# Allegro board ISL95338EVAL1Z_REVB.BRD
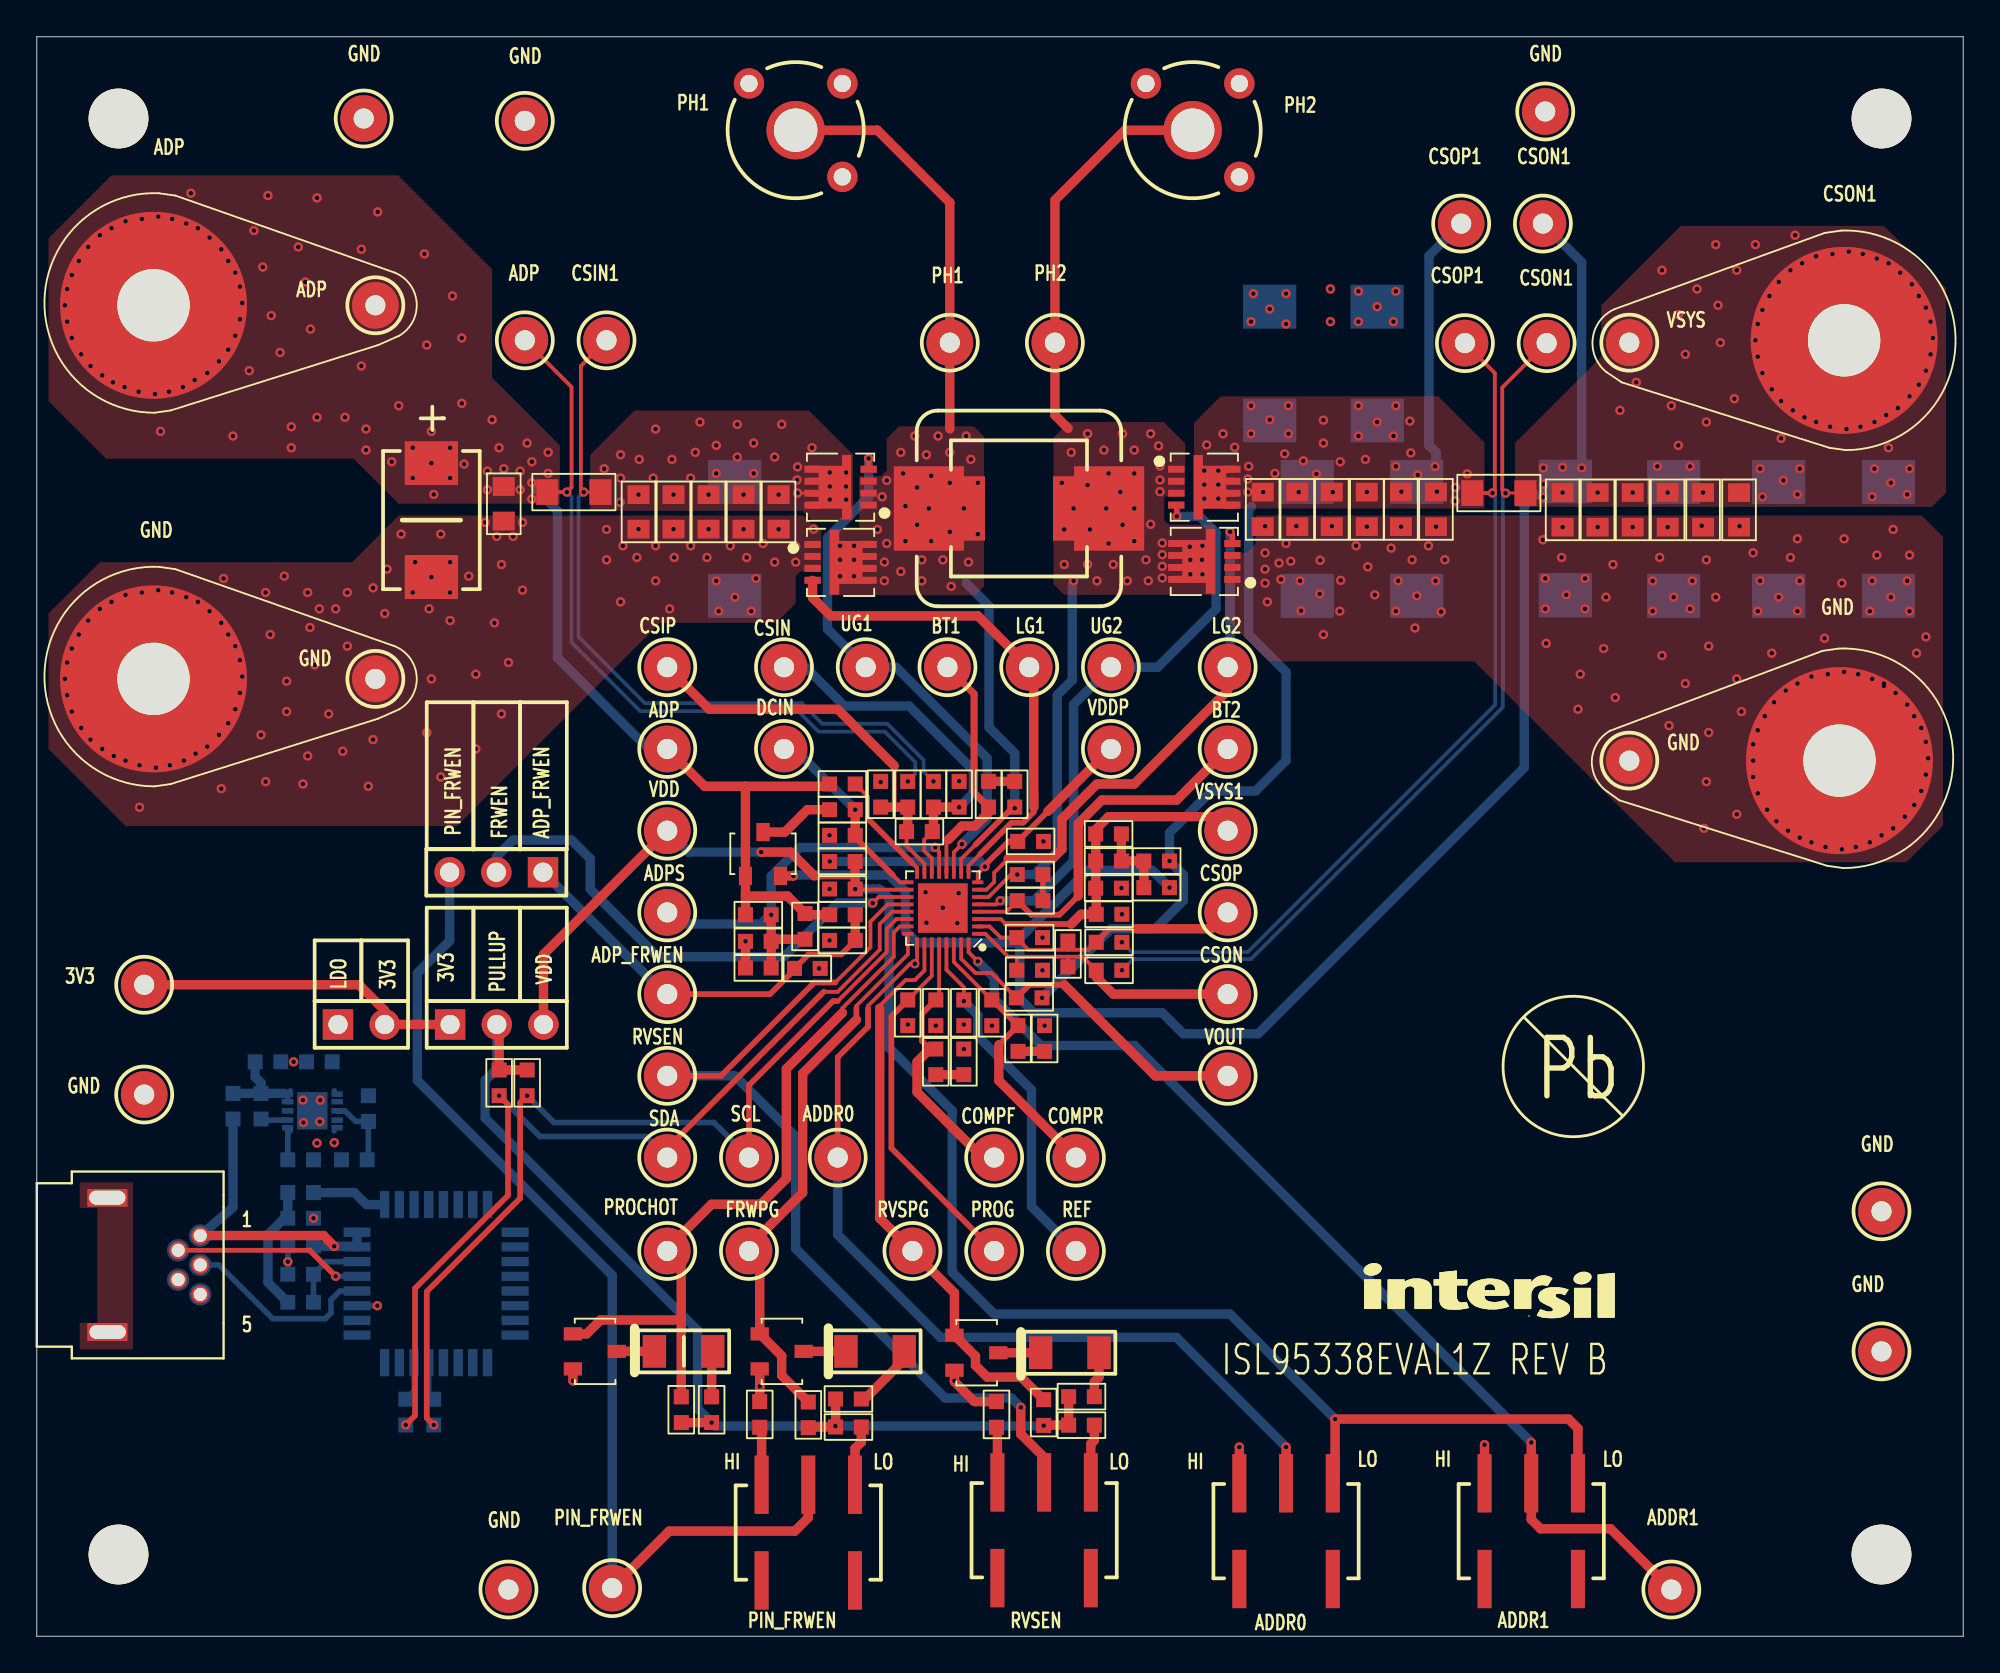
[diagram p0: board, top side]
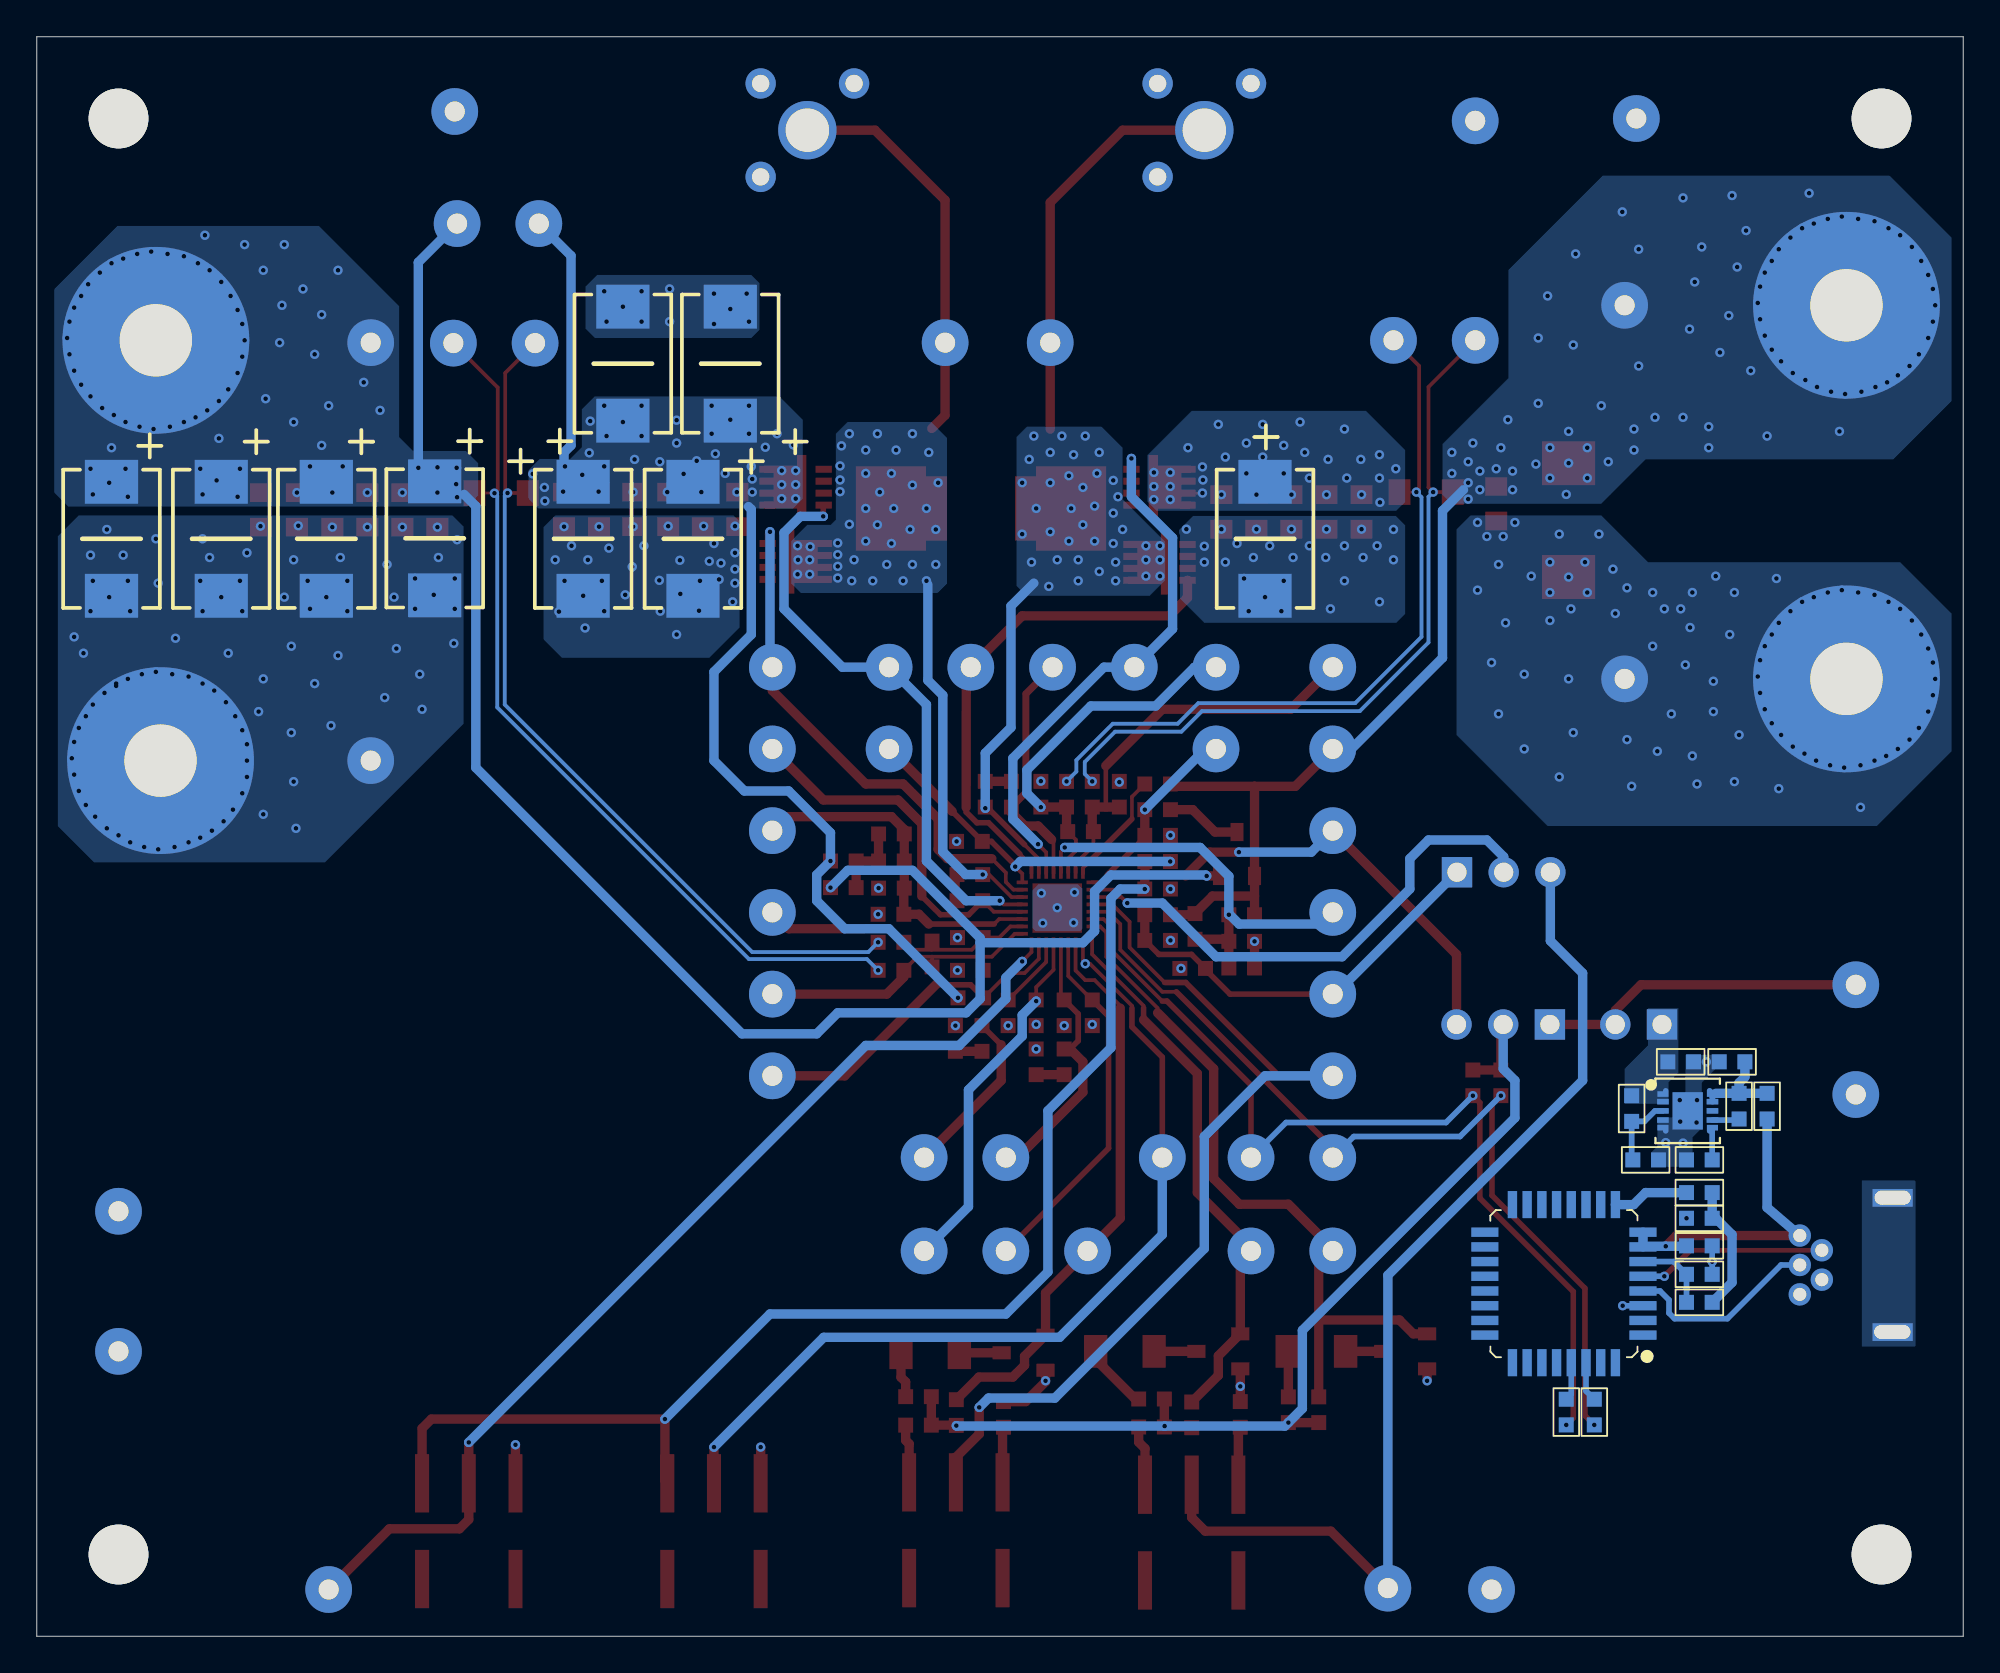
[diagram p1: board, bottom side, seen from below]

Outline 104.78 x 87 mm; copper layers: TOP, L2, L3, BOTTOM. Coordinates in mm from the lower left corner of the outline.
Outline path: 0,87 0,0 104.78,0 104.78,87 0,87 ; 3.18,23.5 arc(2.87,23.87) 3.21,24.21 4.47,24.21 arc(4.8,23.82) 4.39,23.5 3.18,23.5 ; 3.21,16.2 arc(2.9,16.56) 3.23,16.91 4.49,16.91 arc(4.82,16.51) 4.42,16.2 3.21,16.2

## Design rules (mm)
nets with their own width: min track width 0.152; nets CSON1 DCIN

## Placement (name value [footprint] x y rotation side)
C1  NC  [CAP_SANYO_D2]  100.71 59.69 270 bottom
C2  NC  [CAP_SANYO_D2]  94.74 59.69 270 bottom
C3  NC  [CAP_SANYO_D2]  89.03 59.69 270 bottom
C4  NC  [CAP_SANYO_D2]  83.13 59.72 270 bottom
C5  NC  [SM0805_DELTA]  90.63 61.26 90 top
C6  NC  [SM0805_DELTA]  92.58 61.26 90 top
C7  NC  [SM0805_DELTA]  82.99 61.26 90 top
C8  NC  [SM0805_DELTA]  84.89 61.26 90 top
C9  NC  [SM0805_DELTA]  86.8 61.26 90 top
C10  NC  [SM0805_DELTA]  88.7 61.26 90 top
C18  NC  [SM0805_DELTA]  25.4 61.59 90 top
C19  47u  [CAP_SANYO_D2]  37.97 59.69 270 bottom
C20  22u  [SM0805_DELTA]  40.35 61.15 90 top
C21  22u  [SM0805_DELTA]  38.44 61.15 90 top
C22  22u  [SM0805_DELTA]  36.54 61.15 90 top
C23  22u  [SM0805_DELTA]  34.63 61.15 90 top
C24  22u  [SM0805_DELTA]  32.73 61.15 90 top
C26  4.7uF  [SM0603_DELTA]  48.01 43.76 180 top
C28  1u  [SM0603_DELTA]  45.9 45.8 270 top
C29  1u  [SM0603_DELTA]  50.16 45.8 270 top
C30  0.22uF  [SM0603_DELTA]  51.77 45.8 90 top
C31  1uF  [SM0603_DELTA]  43.81 43.56 0 top
C32  1uF  [SM0603_DELTA]  54.05 43.23 180 top
C33  1uF  [SM0603_DELTA]  43.81 40.64 0 top
C34  1u  [SM0603_DELTA]  54 38 180 top
C35  1u  [SM0603_DELTA]  54 36.22 180 top
C36  0.22uF  [SM0603_DELTA]  54.03 40.01 180 top
C37  4.7u  [SM0603_DELTA]  56.08 37.11 90 top
C38  NC  [SM0603_DELTA]  39.24 36.35 0 top
C45  1000pF  [SM0603_DELTA]  50.42 33.91 90 top
C46  22n  [SM0603_DELTA]  50.42 31.24 270 top
C81  1uF  [SM0603_DELTA]  12.57 31.24 180 bottom
C82  1000pF  [SM0603_DELTA]  14.35 25.91 180 bottom
C83  1uF  [SM0603_DELTA]  15.37 31.24 0 bottom
C84  0.1uF  [SM0603_DELTA]  14.35 19.68 0 bottom
C85  0.1uF  [SM0603_DELTA]  14.35 22.73 180 bottom
C86  0.1uF  [SM0603_DELTA]  14.35 21.23 0 bottom
C87  NC  [SM0603_DELTA]  48.89 33.91 90 top
C98  NC  [SM0603_DELTA]  51.94 33.91 90 top
C99  22n  [SM0603_DELTA]  54.81 32.51 270 top
C100  0.1uF  [SM0603_DELTA]  41.91 36.32 180 top
C101  NC  [CAP_SANYO_D2]  21.46 60.71 270 top
C102  NC  [SM0603_DELTA]  41.78 38.61 90 top
C103  NC  [SM0603_DELTA]  58.29 40.69 180 top
C104  NC  [SM0603_DELTA]  58.29 43.64 180 top
C105  22u  [SM0805_DELTA]  70.43 61.29 90 top
C106  22u  [SM0805_DELTA]  72.34 61.29 90 top
C107  22u  [SM0805_DELTA]  74.19 61.29 90 top
C108  22u  [SM0805_DELTA]  76.1 61.29 90 top
C109  22u  [SM0805_DELTA]  68.55 61.29 90 top
C110  22u  [SM0805_DELTA]  66.67 61.29 90 top
C111  47u  [CAP_SANYO_D2]  69.09 59.69 270 bottom
C112  47u  [CAP_SANYO_D2]  75.06 59.69 270 bottom
C113  47u  [CAP_SANYO_D2]  67.06 69.22 90 bottom
C114  47u  [CAP_SANYO_D2]  72.9 69.22 90 bottom
D1  BAT54C  [SOT23]  39.5 42.55 0 top
J1  Banana_J  [111-07XX-001]  6.35 72.39 180 top
J2  Banana_J  [111-07XX-001]  6.35 52.07 180 top
J3  Banana_J  [111-07XX-001]  98.3 70.48 0 top
J4  Banana_J  [111-07XX-001]  98.04 47.62 0 top
J10  USB_MOL54819_0511  [MOL54819_0511]  8.89 20.19 0 top
JP4  conn_2p  [CONN2]  16.38 33.27 0 top
JP6  Jumper_3p  [CONN-1X3]  22.48 33.27 90 top
JP7  Jumper_3p  [CONN-1X3]  27.53 41.55 270 top
L1  10x10  [ETQP4LXXXWFC]  53.42 61.34 180 top
L2  2uH  [IND_PIMB061H]  53.42 61.34 0 top
LED1  597_3311_402  [SM1206]  35.18 15.49 0 top
LED2  597_3311_402  [SM1206]  45.59 15.49 0 top
LED3  597_3311_402  [SM1206]  56.18 15.42 0 top
NOREF  -  []  83.57 30.99 0 top
NOREF#2  -  [unnamed#2]  100.33 4.44 0 top
NOREF#3  -  []  0 87 0 top
NOREF#4  -  []  -88.27 -76.84 0 top
NOREF#5  -  []  70.52 16.32 0 top
NOREF#6  -  [unnamed#2]  100.33 82.55 270 top
NOREF#7  -  [unnamed#2]  4.44 4.44 0 top
NOREF#8  -  [unnamed#2]  4.44 82.55 0 top
NOREF#9  -  []  104.78 0 90 top
Q1  AON7410  [PWRPAK_SINGLE_1212_8]  43.72 62.5 180 top
Q2  AON7410  [PWRPAK_SINGLE_1212_8]  43.72 58.41 0 top
Q3  AON7410  [PWRPAK_SINGLE_1212_8]  63.5 58.46 180 top
Q4  AON7410  [PWRPAK_SINGLE_1212_8]  63.5 62.5 0 top
Q8  2N7002  [SOT23]  40.51 15.49 270 top
Q9  2N7002  [SOT23]  30.35 15.49 270 top
Q10  2N7002  [SOT23]  51.1 15.42 270 top
R1  1  [SM0603_DELTA]  47.37 45.8 270 top
R2  1  [SM0603_DELTA]  48.77 45.8 270 top
R4  0  [SM0603_DELTA]  43.81 46.35 0 top
R6  0  [SM0603_DELTA]  53.19 45.8 90 top
R7  1  [SM0603_DELTA]  43.81 44.96 180 top
R8  4.7  [SM0603_DELTA]  43.81 42.14 180 top
R9  0  [SM0603_DELTA]  39.24 39.24 180 top
R10  1  [SM0603_DELTA]  58.32 37.74 180 top
R11  0  [SM0603_DELTA]  54.03 41.43 0 top
R12  0  [SM0603_DELTA]  53.98 34.72 180 top
R13  NC  [SM0603_DELTA]  39.24 37.8 0 top
R14  1  [SM0603_DELTA]  58.32 36.22 180 top
R15  10K  [SM0603_DELTA]  25.15 30.1 90 top
R16  10K  [SM0603_DELTA]  26.67 30.1 90 top
R23  133K  [SM0603_DELTA]  47.37 33.91 270 top
R27  698  [SM0603_DELTA]  48.89 31.24 270 top
R28  100K  [SM0603_DELTA]  44.15 11.38 0 top
R31  100K  [SM0603_DELTA]  56.82 11.48 0 top
R32  220  [SM0603_DELTA]  36.7 12.32 270 top
R33  220  [SM0603_DELTA]  44.15 12.9 180 top
R34  220  [SM0603_DELTA]  56.82 13.03 180 top
R36  10K  [SM0603_DELTA]  41.96 12.04 90 top
R38  10K  [SM0603_DELTA]  35.05 12.32 90 top
R39  10K  [SM0603_DELTA]  54.76 12.17 90 top
R44  100K  [SM0603_DELTA]  39.32 12.06 90 top
R45  100K  [SM0603_DELTA]  52.2 12.06 90 top
R81  10k  [SM0603_DELTA]  12.19 28.83 270 bottom
R82  5.62K  [SM0603_DELTA]  18.03 28.7 90 bottom
R83  1K  [SM0603_DELTA]  17.27 25.91 0 bottom
R84  0  [SM0603_DELTA]  10.67 28.83 270 bottom
R85  0  [SM0603_DELTA]  20.07 12.19 90 bottom
R86  0  [SM0603_DELTA]  21.59 12.19 90 bottom
R87  1K  [SM0603_DELTA]  14.35 18.16 180 bottom
R88  1K  [SM0603_DELTA]  14.35 24.13 0 bottom
R93  0  [SM0603_DELTA]  58.29 42.16 180 top
R94  NC  [SM0603_DELTA]  58.32 39.27 0 top
R97  698  [SM0603_DELTA]  53.37 32.51 270 top
R98  402K  [SM0603_DELTA]  43.81 39.24 180 top
R99  135k  [SM0603_DELTA]  43.81 37.85 0 top
R102  NC  [SM0603_DELTA]  60.91 42.16 0 top
R103  0  [SM0603_DELTA]  60.91 40.72 180 top
RS1  0.02  [SM1206_DELTA]  29.21 62.23 180 top
RS2  0.01  [SM1206_DELTA]  79.52 62.18 180 top
SW1  GT11MSCKE  [GT11SC]  41.96 5.64 180 top
SW2  GT11MSCKE  [GT11SC]  54.79 5.77 180 top
SW3  GT11MSCKE  [GT11SC]  67.94 5.71 180 top
SW4  GT11MSCKE  [GT11SC]  81.28 5.71 180 top
TP1  KEYSTONE-PN-500X-100P40H  [MTP500X]  18.41 72.39 0 top
TP2  KEYSTONE-PN-500X-100P40H  [MTP500X]  18.41 52.07 0 top
TP3  KEYSTONE-PN-500X-100P40H  [MTP500X]  26.54 70.48 270 top
TP4  KEYSTONE-PN-500X-100P40H  [MTP500X]  86.61 70.36 0 top
TP5  KEYSTONE-PN-500X-100P40H  [MTP500X]  86.61 47.62 0 top
TP6  KEYSTONE-PN-500X-100P40H  [MTP500X]  30.99 70.48 270 top
TP7  KEYSTONE-PN-500X-100P40H  [MTP500X]  34.29 48.26 0 top
TP8  KEYSTONE-PN-500X-100P40H  [MTP500X]  81.91 76.83 0 top
TP9  KEYSTONE-PN-500X-100P40H  [MTP500X]  45.09 52.7 90 top
TP10  KEYSTONE-PN-500X-100P40H  [MTP500X]  58.42 52.7 0 top
TP11  KEYSTONE-PN-500X-100P40H  [MTP500X]  40.64 52.7 0 top
TP12  KEYSTONE-PN-500X-100P40H  [MTP500X]  34.29 52.7 90 top
TP13  Probe Socket  [TEK131-4353-00]  62.86 81.91 0 top
TP14  Probe Socket  [TEK131-4353-00]  41.27 81.91 0 top
TP15  KEYSTONE-PN-500X-100P40H  [MTP500X]  49.53 52.7 0 top
TP16  KEYSTONE-PN-500X-100P40H  [MTP500X]  53.98 52.7 0 top
TP17  KEYSTONE-PN-500X-100P40H  [MTP500X]  40.64 48.26 0 top
TP18  KEYSTONE-PN-500X-100P40H  [MTP500X]  64.77 52.7 0 top
TP19  KEYSTONE-PN-500X-100P40H  [MTP500X]  58.42 48.26 0 top
TP20  KEYSTONE-PN-500X-100P40H  [MTP500X]  34.29 43.81 0 top
TP21  KEYSTONE-PN-500X-100P40H  [MTP500X]  34.29 39.37 0 top
TP22  KEYSTONE-PN-500X-100P40H  [MTP500X]  64.77 48.26 0 top
TP23  KEYSTONE-PN-500X-100P40H  [MTP500X]  77.67 70.33 90 top
TP24  KEYSTONE-PN-500X-100P40H  [MTP500X]  34.29 26.04 0 top
TP25  KEYSTONE-PN-500X-100P40H  [MTP500X]  64.77 43.81 0 top
TP26  KEYSTONE-PN-500X-100P40H  [MTP500X]  38.73 26.04 0 top
TP27  KEYSTONE-PN-500X-100P40H  [MTP500X]  64.77 39.37 0 top
TP28  KEYSTONE-PN-500X-100P40H  [MTP500X]  34.29 34.92 0 top
TP29  KEYSTONE-PN-500X-100P40H  [MTP500X]  82.12 70.33 90 top
TP30  KEYSTONE-PN-500X-100P40H  [MTP500X]  64.77 34.92 0 top
TP31  KEYSTONE-PN-500X-100P40H  [MTP500X]  43.56 26.04 0 top
TP32  KEYSTONE-PN-500X-100P40H  [MTP500X]  88.9 2.54 0 top
TP33  KEYSTONE-PN-500X-100P40H  [MTP500X]  52.07 20.95 0 top
TP34  KEYSTONE-PN-500X-100P40H  [MTP500X]  56.52 26.04 0 top
TP35  KEYSTONE-PN-500X-100P40H  [MTP500X]  64.77 30.48 0 top
TP36  KEYSTONE-PN-500X-100P40H  [MTP500X]  56.52 20.95 0 top
TP37  KEYSTONE-PN-500X-100P40H  [MTP500X]  52.07 26.04 0 top
TP43  KEYSTONE-PN-500X-100P40H  [MTP500X]  31.29 2.62 0 top
TP44  KEYSTONE-PN-500X-100P40H  [MTP500X]  34.29 30.48 0 top
TP45  KEYSTONE-PN-500X-100P40H  [MTP500X]  38.73 20.95 0 top
TP46  KEYSTONE-PN-500X-100P40H  [MTP500X]  34.29 20.95 0 top
TP47  KEYSTONE-PN-500X-100P40H  [MTP500X]  47.62 20.95 0 top
TP48  KEYSTONE-PN-500X-100P40H  [MTP500X]  26.54 82.42 0 top
TP49  KEYSTONE-PN-500X-100P40H  [MTP500X]  17.78 82.55 0 top
TP50  KEYSTONE-PN-500X-100P40H  [MTP500X]  5.84 29.46 0 top
TP51  KEYSTONE-PN-500X-100P40H  [MTP500X]  100.33 15.49 0 top
TP52  KEYSTONE-PN-500X-100P40H  [MTP500X]  100.33 23.11 0 top
TP53  KEYSTONE-PN-500X-100P40H  [MTP500X]  5.84 35.43 0 top
TP54  KEYSTONE-PN-500X-100P40H  [MTP500X]  25.65 2.54 0 top
TP55  KEYSTONE-PN-500X-100P40H  [MTP500X]  82.04 82.93 0 top
TP56  KEYSTONE-PN-500X-100P40H  [MTP500X]  49.66 70.36 0 top
TP57  KEYSTONE-PN-500X-100P40H  [MTP500X]  55.37 70.36 0 top
TP58  KEYSTONE-PN-500X-100P40H  [MTP500X]  77.47 76.83 0 top
U1  ISL95338  [QFN32_157X157_157_EP]  49.28 39.6 180 top
U2  C8051F320  [LQFP32_275X275_315]  21.72 19.18 90 bottom
U3  ISL80101IRAJZ  [DFN10_118X118_197_EP]  14.99 28.58 180 bottom

## Library data of the parts
C1-C4 C19 C101 C111-C114 = SANYO-POSCAP-D2: User Part Number: CAP_SANYO_D2
C5-C10 C18 C20-C24 C105-C110 = 0603: User Part Number: SM0805_DELTA
C26 C28-C37 C45 C46 C81-C87 C98 C99 R32-R34 = 0603: User Part Number: SM0603_DELTA
C38 C100 C102-C104 R1 R2 R4 R6-R16 R23 R27 R28 R31 R36 R38 R39 R44 R45 R84-R86 R93 R94 R97-R99 R102 R103 = 0201: User Part Number: SM0603_DELTA
D1 = BAT54C/SOT: User Part Number: SOT23
J1-J4 = Banana_J: User Part Number: 111-07XX-001
J10 = USB_MOL54819_0511: User Part Number: MOL54819_0511
JP4 = conn_2p: User Part Number: CONN2
JP6 JP7 = Jumper_3p: User Part Number: CONN-1X3
L1 = PANASONIC-ETQP4L: User Part Number: ETQP4LXXXWFC
L2 = COILCRAFT-CHIP-IND-0805: User Part Number: IND_PIMB061H
LED1-LED3 = LN1461C: User Part Number: SM1206
Q1-Q4 = AON7410_0: User Part Number: Si7655DN
Q8-Q10 = 2N7002: User Part Number: SOT23
R81-R83 R87 R88 = 0402: User Part Number: SM0603_DELTA
RS1 RS2 = 0805: User Part Number: SM1206_DELTA
SW1-SW4 = G3T12AP_9: User Part Number: GT11SC
TP1-TP12 TP15-TP37 TP43-TP58 = KEYSTONE-PN-500X-100P40H: User Part Number: MTP500X
TP13 TP14 = Probe Socket_4P: User Part Number: TEK131-4353-00
U1 = ISL9237_5: User Part Number: QFN32_157x157_157_EP
U2 = ISL65006_1: User Part Number: LQFP32_275X275_315
U3 = ISL80101_DFN: User Part Number: U3

## Footprints (pads in the part's own frame, mm; a bottom-side part is the same pattern mirrored in y, then rotated)
111-07XX-001
  round 10.16 hole 3.937: 1(0,0)
CAP_SANYO_D2
  rect 2.388x2.896 smd: 1(-3.099,0) 2(3.099,0)
CONN2
  rect 1.651x1.651 hole 1.041: 1(0,0)
  round 1.651 hole 1.041: 2(2.54,0)
CONN-1X3
  rect 1.651x1.651 hole 1.041: 1(0,0)
  round 1.651 hole 1.041: 2(0,-2.54) 3(0,-5.08)
DFN10_118X118_197_EP
  custom 0.604x0.477 smd: 1(-1.346,1.001) 5(-1.346,-1.001) 6(1.346,-1.001) 10(1.346,1.001)
  rect 0.635x0.305 smd: 2(-1.346,0.5) 3(-1.346,0) 4(-1.346,-0.5) 7(1.346,-0.5) 8(1.346,0) 9(1.346,0.5)
  rect 1.651x2.032 smd: 11(0,0)
ETQP4LXXXWFC
  rect 3.81x4.597 smd: 1(-4.902,0) 2(4.902,0)
GT11SC
  rect 0.762x3.175 smd: 1(2.54,-2.603) 2(0,-2.603) 3(-2.54,-2.603) 4(2.54,2.603) 6(-2.54,2.603)
IND_PIMB061H
  rect 2.35x3.5 smd: 1(-3.025,0) 2(3.025,0)
LQFP32_275X275_315
  rect 0.508x1.473 smd: 1(-2.8,-4.3) 2(-2,-4.3) 3(-1.2,-4.3) 4(-0.4,-4.3) 5(0.4,-4.3) 6(1.2,-4.3) 7(2,-4.3) 8(2.8,-4.3) 17(2.8,4.3) 18(2,4.3) 19(1.2,4.3) 20(0.4,4.3) 21(-0.4,4.3) 22(-1.2,4.3) 23(-2,4.3) 24(-2.8,4.3)
  rect 1.473x0.508 smd: 9(4.3,-2.8) 10(4.3,-2) 11(4.3,-1.2) 12(4.3,-0.4) 13(4.3,0.4) 14(4.3,1.2) 15(4.3,2) 16(4.3,2.8) 25(-4.3,2.8) 26(-4.3,2) 27(-4.3,1.2) 28(-4.3,0.4) 29(-4.3,-0.4) 30(-4.3,-1.2) 31(-4.3,-2) 32(-4.3,-2.8)
MOL54819_0511
  round 0.965 hole 0.711: 1(0,1.6) 2(-1.2,0.8) 3(0,0) 4(-1.2,-0.8) 5(0,-1.6)
  rect 2.184x0.965 hole 1.93x0.711: 6(-5.05,-3.65) 7(-5.05,3.65)
MTP500X
  round 2.54 hole 1.092: 1(0,0)
PWRPAK_SINGLE_1212_8
  rect 0.889x0.381 smd: 1(-1.524,0.975) 2(-1.524,0.325) 3(-1.524,-0.325) 4(-1.524,-0.975) 5(1.524,-0.975) 6(1.524,-0.325) 7(1.524,0.325) 8(1.524,0.975)
QFN32_157X157_157_EP
  rect 0.61x0.203 smd: 1(-1.9,1.4) 2(-1.9,1) 3(-1.9,0.6) 4(-1.9,0.2) 5(-1.9,-0.2) 6(-1.9,-0.6) 7(-1.9,-1) 8(-1.9,-1.4) 17(1.9,-1.4) 18(1.9,-1) 19(1.9,-0.6) 20(1.9,-0.2) 21(1.9,0.2) 22(1.9,0.6) 23(1.9,1) 24(1.9,1.4)
  rect 0.203x0.61 smd: 9(-1.4,-1.9) 10(-1,-1.9) 11(-0.6,-1.9) 12(-0.2,-1.9) 13(0.2,-1.9) 14(0.6,-1.9) 15(1,-1.9) 16(1.4,-1.9) 25(1.4,1.9) 26(1,1.9) 27(0.6,1.9) 28(0.2,1.9) 29(-0.2,1.9) 30(-0.6,1.9) 31(-1,1.9) 32(-1.4,1.9)
  rect 2.692x2.692 smd: 33(0,0)
SM0603_DELTA
  rect 0.813x0.813 smd: 1(-0.699,0) 2(0.699,0)
SM0805_DELTA
  rect 1.016x1.194 smd: 1(-0.94,0) 2(0.94,0)
SM1206
  rect 1.27x1.778 smd: 1(-1.587,0) 2(1.587,0)
SM1206_DELTA
  rect 1.194x1.397 smd: 1(-1.448,0) 2(1.448,0)
SOT23
  rect 0.711x0.991 smd: 1(-0.953,-1.194) 2(0.953,-1.194) 3(0,1.194)
TEK131-4353-00
  round 3.175 hole 2.362: 1(0,0)
  round 1.651 hole 0.94: 2(2.54,-2.54) 3(2.54,2.54) 4(-2.54,2.54)
unnamed#2
  round 3.251 hole 3.251 unplated: (0,0)

## Nets
3V3: JP4.2 JP6.1 TP53.1
GND: C1.2(N) C2.2(N) C3.2(N) C4.2(N) C5.1 C6.1 C7.1 C8.1 C9.1 C10.1 C18.1 C19.2(N) C20.1 C21.1 C22.1 C23.1 C24.1 C28.1 C29.1 C31.1 C32.1 C33.1 C34.1 C35.1 C38.1 C45.1 C46.1 C81.1 C82.1 C83.1 C84.1 C85.1 C86.1 C87.1 C98.1 C99.1 C100.1 C101.2(N) C103.1 C105.1 C106.1 C107.1 C108.1 C109.1 C110.1 C111.2(N) C112.2(N) C113.2(N) C114.2(N) J2.1 J4.1 J10.4 J10.5 J10.6 J10.7 Q2.1(S#1) Q2.2(S#2) Q2.3(S#3) Q3.1(S#1) Q3.2(S#2) Q3.3(S#3) Q8.2(SOURCE) Q9.2(SOURCE) Q10.2(SOURCE) R13.1 R23.2 R44.2 R45.2 R83.1 R94.2 R99.1 SW3.1 SW4.1 TP2.1 TP5.1 TP13.2(GND2) TP13.3(GND3) TP13.4(GND4) TP14.2(GND2) TP14.3(GND3) TP14.4(GND4) TP48.1 TP49.1 TP50.1 TP51.1 TP52.1 TP54.1 TP55.1 U1.33(PGND) U2.3(GND) U3.4(PG) U3.5(GND) U3.11(EP)
VDD: C33.2 JP6.3 R8.1 SW3.3 SW4.3 TP20.1 U1.18(VDD)
VDDP: C32.2 R8.2 TP19.1 U1.8(VDDP)
ADDR0: SW3.2 TP31.1 U1.25(ADDR0)
ADDR1: SW4.2 TP32.1 U1.32(ADDR1)
ADP: C18.2 C101.1(P) C102.2 D1.1(C1) J1.1 R1.1 R4.1 R9.2 R98.2 RS1.2 TP1.1 TP3.1 TP7.1
ADP_FRWEN: C100.2 JP7.1 R98.1 R99.2 TP28.1
ADPS: C38.2 C102.1 R9.1 R13.2 TP21.1 U1.13(ADPS)
BT1: C30.1 TP15.1 U1.12(BOOT1)
BT2: C36.2 TP22.1 U1.4(BOOT2)
COMPF: C87.2 R27.1 TP37.1 U1.28(COMPF)
COMPR: C98.2 R97.1 TP34.1 U1.30(COMPR)
CSIN: C26.1 C29.2 R2.2 TP11.1 U1.14(CSIN)
CSIN1: C19.1(P) C20.2 C21.2 C22.2 C23.2 C24.2 Q1.5(D#5) Q1.6(D#6) Q1.7(D#7) Q1.8(D#8) R2.1 RS1.1 TP6.1
CSIP: C26.2 C28.2 R1.2 TP12.1 U1.15(CSIP)
CSON: C35.2 C37.1 R14.2 TP30.1 U1.1(CSON)
CSON1: C1.1(P) C2.1(P) C3.1(P) C4.1(P) C5.2 C6.2 C7.2 C8.2 C9.2 C10.2 D1.2(C2) J3.1 R14.1 R103.1 RS2.1 TP4.1 TP8.1 TP29.1
CSOP: C34.2 C37.2 R10.2 TP27.1 U1.2(CSOP)
CSOP1: C105.2 C106.2 C107.2 C108.2 C109.2 C110.2 C111.1(P) C112.1(P) C113.1(P) C114.1(P) Q4.5(D#5) Q4.6(D#6) Q4.7(D#7) Q4.8(D#8) R10.1 R12.1 R102.2 RS2.2 TP23.1 TP58.1
DCIN: C31.2 R7.1 TP17.1 U1.17(DCIN)
FRWEN: JP7.2 U1.19(FRWEN)
FRWPG: Q8.1(GATE) R36.2 TP45.1 U1.24(FRWPG)
LG1: Q2.4(G) TP16.1 U1.9(LGATE1)
LG2: Q3.4(G) TP18.1 U1.7(LGATE2)
P1.4: U2.22(P1.4)
P1.5: U2.21(P1.5)
P1.6: U2.20(P1.6)
P1.7: U2.19(P1.7)
P2.0: U2.18(P2.0)
P2.1: U2.17(P2.1)
P2.2: U2.16(P2.2)
P2.3: U2.15(P2.3)
P2.4: U2.14(P2.4)
P2.5: U2.13(P2.5)
P2.6: U2.12(P2.6)
P2.7: U2.11(P2.7)
P3.0/C2D: U2.10(P3.0/C2D)
PH1: L1.2 L2.1 Q1.1(S#1) Q1.2(S#2) Q1.3(S#3) Q2.5(D#5) Q2.6(D#6) Q2.7(D#7) Q2.8(D#8) R6.1 TP14.1(SIGNAL) TP56.1 U1.10(PHASE1)
PH2: L1.1 L2.2 Q3.5(D#5) Q3.6(D#6) Q3.7(D#7) Q3.8(D#8) Q4.1(S#1) Q4.2(S#2) Q4.3(S#3) R11.1 TP13.1(SIGNAL) TP57.1 U1.6(PHASE2)
PIN_FRWEN: JP7.3 SW1.2 TP43.1
PROCHOT: Q9.1(GATE) R38.2 TP46.1 U1.23(PROCHOT)
PROG: R23.1 TP33.1 U1.27(PROG)
PULLUP: JP6.2 R15.2 R16.2 R28.1 R31.1 R32.2 R33.2 R34.2 R36.1 R38.1 R39.1
REF: C45.2 TP36.1 U1.29(REF)
RVSEN: SW2.2 TP44.1 U1.20(RVSEN)
RVSPG: Q10.1(GATE) R39.2 TP47.1 U1.26(RVSPG)
SCL: R16.1 R86.1 TP26.1 U1.22(SCL)
SDA: R15.1 R85.1 TP24.1 U1.21(SDA)
UG1: Q1.4(G) TP9.1 U1.11(UGATE1)
UG2: Q4.4(G) TP10.1 U1.5(UGATE2)
VOUT: R12.2 TP35.1 U1.31(VOUT)
VSYS1: C103.2 C104.2 R93.2 R94.1 TP25.1 U1.3(VOUTS)
N3388611: C85.2 R87.2 R88.1
N3403853: R86.2 U2.29(P0.5)
N3403912: R85.2 U2.30(P0.4)
N3404418: C86.2 J10.1 R84.2 U2.7(REGIN) U2.8(VBUS)
N3404574: J10.2 U2.5(D-)
N3404616: J10.3 U2.4(D+)
N3405190: C84.2 R87.1 U2.6(VDD)
N3405391: R88.2 U2.9(RST/C2CK)
N3864784: R81.2 U3.7(ENABLE)
N3864951: C82.2 U3.6(SS)
N3865034: C83.2 JP4.1 R82.2 U3.1(VOUT#1) U3.2(VOUT#2)
N3865052: R82.1 R83.2 U3.3(SENSE/ADJ)
N3866091: C81.2 R81.1 R84.1 U3.9(VIN#9) U3.10(VIN#10)
N3880625: C46.2 R27.2
N3892442: R4.2 U1.16(ADP)
N3896496: D1.3(A) R7.2
N3899462: LED3.2(ANODE) R34.1
N3906567: R44.1 SW1.1
N3906607: R28.2 SW1.3
N3907387: R45.1 SW2.1
N3907453: R31.2 SW2.3
N3914358: LED2.2(ANODE) R33.1
N3914362: LED2.1(CATHODE) Q8.3(DRAIN)
N3952115: C36.1 R11.2
N4021953: C30.2 R6.2
N4039122: LED3.1(CATHODE) Q10.3(DRAIN)
N4143346: C104.1 R93.1 R102.1 R103.2
N4149486: C99.2 R97.2
N4161658: LED1.2(ANODE) R32.1
N4161662: LED1.1(CATHODE) Q9.3(DRAIN)

Pads without a net: SW1 4 6; SW2 4 6; SW3 4 6; SW4 4 6; U2 1 2 23 24 25 26 27 28 31 32; U3 8

## Via types
v1: diameter 0.508, hole 0.254, TOP to BOTTOM, 660 vias

## Routing (per net, layer and track width the routed paths; a pad name or vN(x,y) marks a point on that pad's centre or on a via; arc(x,y) is an arc through that point)
3V3: length 18
  TOP w0.508: TP53.1 17.53,35.43 18.92,34.04 JP4.2 JP6.1
GND: length 13.9
  TOP w0.508: Q10.2 v1(49.91,13.89) 49.91,13.84 50.99,12.76 R45.2 ; C38.1 v1(38.54,37.8) ; R44.2 v1(39.32,13.59) Q8.2 ; SW4.1 v1(78.74,10.41) ; Q9.2 v1(29.16,13.89) ; SW3.1 v1(65.41,10.29)
  BOTTOM w0.305: U2.3 v1(18.52,17.98) ; C84.1 v1(13.65,20.37) C86.1
  vias: v1(1.52,52.07) v1(1.65,52.96) v1(1.65,51.18) v1(1.91,53.72) v1(1.91,50.29) v1(2.29,54.48) v1(2.41,49.4) v1(2.79,55.24) v1(2.92,48.77) v1(3.43,55.88) v1(3.56,48.26) v1(4.06,56.26) v1(4.19,47.88) v1(4.83,56.64) v1(4.83,47.62) v1(5.59,47.37) v1(5.59,45.09) v1(5.71,56.77) v1(6.48,47.24) v1(6.6,56.9) v1(7.24,47.37) v1(7.37,56.77) v1(8,47.62) v1(8.13,56.52) v1(8.64,48.01) v1(8.76,56.26) v1(9.27,48.39) v1(9.4,55.75) v1(9.91,49.02) v1(10.03,55.12) v1(10.03,46.1) v1(10.16,57.53) v1(10.41,54.48) v1(10.41,49.66) v1(10.79,53.85) v1(10.79,50.42) v1(11.05,53.09) v1(11.05,51.31) v1(11.18,52.2) v1(12.19,49.02) v1(12.45,56.77) v1(12.45,46.48) v1(12.7,54.48) v1(13.46,57.66) v1(13.59,51.94) v1(13.59,50.29) v1(13.97,31.24) v1(14.48,46.35) v1(14.48,29.16) v1(14.5,27.94) v1(14.73,56.77) v1(14.73,47.88) v1(14.86,54.86) v1(15.11,52.83) v1(15.05,22.73) v1(15.24,26.82) v1(15.37,55.88) v1(15.42,29.16) v1(15.39,27.99) v1(15.88,50.16) v1(16.18,26.85) v1(16.26,55.88) v1(16.64,48.13) v1(16.89,56.77) v1(16.89,53.85) v1(18.03,46.23) v1(18.29,57.02) v1(18.29,48.77) v1(18.92,55.63) v1(19.05,58.04) v1(19.81,59.94) v1(20.45,56.77) v1(20.57,58.42) v1(21.21,49.15) v1(21.34,55.88) v1(21.46,57.61) v1(21.46,52.07) v1(21.97,59.94) v1(21.97,46.74) v1(22.48,58.42) v1(22.48,56.77) v1(22.48,55.24) v1(23.49,57.66) v1(23.88,52.32) v1(23.88,48.26) v1(24.38,60.58) v1(24.89,55.12) v1(25.02,59.82) v1(25.27,58.29) v1(25.27,50.16) v1(25.65,52.96) v1(25.91,59.82) v1(26.42,60.58) v1(26.42,56.9) v1(30.99,60.2) v1(30.99,58.55) v1(31.75,56.26) v1(31.88,59.31) v1(32.64,58.67) v1(32.73,60.21) v1(33.66,59.31) v1(33.66,57.4) v1(34.42,55.88) v1(34.63,60.21) v1(34.67,58.67) v1(35.56,59.31) v1(36.54,60.21) v1(36.45,58.67) v1(36.96,57.4) v1(37.08,55.75) v1(37.72,59.31) v1(37.97,56.52) v1(38.44,60.21) v1(38.61,58.67) v1(38.86,55.75) v1(39.12,57.53) v1(39.5,59.44) v1(40.13,58.42) v1(40.35,60.21) v1(41.27,59.28) v1(41.27,58.42) v1(42.25,60.21) v1(42.55,36.32) v1(43.12,43.56) v1(43.12,40.64) v1(43.12,37.85) v1(45.9,46.46) v1(47.37,33.27) v1(48.34,40.46) v1(48.39,38.81) v1(48.89,33.21) v1(49.28,39.62) v1(50.14,40.41) v1(50.06,38.79) v1(50.16,46.51) v1(50.42,33.27) v1(50.42,31.94) v1(51.94,33.21) v1(54.7,38) v1(54.7,36.22) v1(54.75,43.23) v1(54.81,33.21) v1(58.99,40.69) v1(59.02,39.27) v1(66.04,71.5) v1(66.17,73.03) v1(66.8,60.38) v1(66.8,58.93) v1(66.8,58.04) v1(66.8,57.28) v1(66.93,56.26) v1(67.06,72.19) v1(67.56,58.37) v1(67.67,57.48) v1(67.94,73.03) v1(67.94,71.37) v1(67.94,59.44) v1(68.2,58.47) v1(68.5,60.38) v1(68.71,57.4) v1(68.76,55.78) v1(69.8,58.52) v1(69.77,56.69) v1(69.98,54.48) v1(70.36,73.28) v1(70.36,71.5) v1(70.43,60.38) v1(70.92,57.43) v1(70.87,55.75) v1(71.75,59.31) v1(71.88,73.15) v1(71.88,71.5) v1(72.34,60.35) v1(72.39,58.17) v1(72.77,56.64) v1(72.9,72.31) v1(73.66,59.18) v1(73.79,71.5) v1(73.91,73.15) v1(73.91,55.75) v1(74.04,57.4) v1(74.19,60.35) v1(74.8,58.55) v1(74.96,54.84) v1(75.06,56.59) v1(75.69,59.31) v1(76.1,60.35) v1(76.07,57.4) v1(76.38,55.73) v1(76.58,58.55) v1(81.91,59.64) v1(82.04,57.53) v1(82.04,55.88) v1(82.09,54) v1(82.93,58.67) v1(82.99,60.32) v1(83.19,56.64) v1(83.82,50.42) v1(83.95,52.32) v1(84.2,57.53) v1(84.2,55.88) v1(84.89,60.32) v1(85.22,53.72) v1(85.34,56.52) v1(85.72,58.29) v1(85.85,51.05) v1(86.8,60.32) v1(87.88,57.4) v1(87.88,55.75) v1(88.27,58.67) v1(88.39,53.34) v1(88.7,60.32) v1(88.77,49.53) v1(89.03,56.52) v1(89.66,51.82) v1(89.92,55.88) v1(90.04,57.4) v1(90.55,60.4) v1(90.68,43.94) v1(90.8,58.55) v1(90.8,46.48) v1(90.93,53.85) v1(90.93,49.15) v1(91.31,56.52) v1(92.46,52.07) v1(92.46,44.7) v1(92.61,60.38) v1(92.71,50.29) v1(93.34,58.93) v1(93.34,48.51) v1(93.34,47.62) v1(93.34,46.74) v1(93.6,55.75) v1(93.6,49.28) v1(93.6,45.85) v1(93.73,57.4) v1(93.98,50.04) v1(94.11,44.96) v1(94.36,53.47) v1(94.49,50.8) v1(94.61,44.32) v1(94.74,56.52) v1(95.12,51.43) v1(95.25,43.81) v1(95.38,58.67) v1(95.76,59.69) v1(95.76,55.75) v1(95.76,51.82) v1(95.89,57.4) v1(95.89,43.43) v1(96.52,52.2) v1(96.52,43.18) v1(97.23,54.28) v1(97.28,42.93) v1(97.41,52.32) v1(98.17,57.28) v1(98.17,42.8) v1(98.3,59.69) v1(98.3,52.45) v1(98.93,42.93) v1(99.06,52.32) v1(99.69,55.75) v1(99.69,43.18) v1(99.82,57.4) v1(99.82,52.07) v1(100.08,58.8) v1(100.33,43.56) v1(100.46,51.82) v1(100.46,51.69) v1(100.84,56.52) v1(100.97,60.2) v1(100.97,43.94) v1(101.09,51.31) v1(101.6,44.58) v1(101.73,57.4) v1(101.73,50.67) v1(101.85,58.8) v1(101.85,55.75) v1(102.11,50.04) v1(102.11,45.21) v1(102.23,53.47) v1(102.49,49.4) v1(102.49,45.97) v1(102.74,54.36) v1(102.74,48.64) v1(102.74,46.86) v1(102.87,47.75)
VDD: length 96.8
  TOP w0.203: v1(44.51,40.64) 44.55,40.6 U1.18
  TOP w0.305: 44.5,41.35 42.29,41.35
  TOP w0.508: SW3.3 70.61,8.45 v1(70.61,11.81) 83.31,11.81 83.82,11.3 83.82,8.32 ; JP6.3 27.56,37.08 TP20.1 ; v1(39.4,42.65) 41,42.65 42.29,41.35 ; v1(44.51,40.64) 44.51,41.34 44.5,41.35 44.5,42.03 R8.1
  BOTTOM w0.508: v1(44.51,40.64) 45.85,40.64 46.35,40.13 46.35,32 49.78,28.58 49.78,19.81 52.07,17.53 64.9,17.53 v1(70.61,11.81) ; TP20.1 35.46,42.65 v1(39.4,42.65)
VDDP: length 19.1
  TOP w0.203: 51.56,41.94 v1(51.56,41.86) 51.18,41.47 U1.8
  TOP w0.305: 54.99,44.87 C32.2 52.86,43.23 51.56,41.94
  TOP w0.508: 54.99,44.87 58.38,48.26 TP19.1
  BOTTOM w0.508: v1(51.56,41.86) 51.28,42.14 v1(43.13,42.14)
ADDR0: length 48.9
  TOP w0.203: U1.25 47.88,36.7 v1(47.75,36.58) 47.5,36.58 45.21,34.29 45.21,34.16
  TOP w0.305: TP31.1 43.56,31.5 45.21,33.15 45.21,34.16
  TOP w0.508: v1(67.94,10.29) SW3.2
  BOTTOM w0.508: v1(67.94,10.29) 61.98,16.26 49.15,16.26 43.56,21.84 TP31.1
ADDR1: length 56.2
  TOP w0.203: v1(51.18,36.7) 50.68,37.21 U1.32
  TOP w0.508: TP32.1 85.6,5.84 81.79,5.84 81.28,6.35 SW4.2 v1(81.28,10.54)
  BOTTOM w0.508: v1(51.18,36.7) 52.07,35.81 52.07,34.67 54.61,32.13 59.69,32.13 v1(81.28,10.54)
ADP: length 80.7
  TOP w0.203: TP3.1 29.08,67.95 29.08,62.48 v1(28.83,62.23) RS1.2
  TOP w0.508: 38.54,46.23 42.99,46.23 R4.1 ; 38.54,46.23 36.32,46.23 TP7.1 ; 38.54,46.23 D1.1 38.54,40.26 ; R9.2 38.54,40.26 ; 38.54,40.26 40.83,40.26 C102.2 41.85,39.24 R98.2
  BOTTOM w0.203: v1(47.37,46.49) 47.78,46.9 47.78,47.55 46.13,49.2 42.52,49.2 41.4,50.32 32.82,50.32 29.08,54.05 29.08,61.98 v1(28.83,62.23)
  BOTTOM w0.508: TP7.1 33.27,48.26 28.32,53.21 28.32,61.21 27.18,62.36
  vias: v1(1.52,72.39) v1(1.65,73.28) v1(1.65,71.5) v1(1.91,74.04) v1(1.91,70.61) v1(2.29,74.8) v1(2.41,69.72) v1(2.79,75.56) v1(2.92,69.09) v1(3.43,76.2) v1(3.56,68.58) v1(4.06,76.58) v1(4.14,68.2) v1(4.83,76.96) v1(4.78,67.95) v1(5.54,67.69) v1(5.71,77.09) v1(6.43,67.56) v1(6.6,77.22) v1(6.73,65.53) v1(7.19,67.69) v1(7.37,77.09) v1(7.95,67.95) v1(8.13,76.83) v1(8.38,78.49) v1(8.59,68.33) v1(8.76,76.58) v1(9.27,68.71) v1(9.4,76.07) v1(9.91,69.34) v1(10.03,75.44) v1(10.41,74.8) v1(10.41,69.98) v1(10.67,65.28) v1(10.79,74.17) v1(10.79,70.74) v1(11.05,73.41) v1(11.05,71.63) v1(11.18,72.52) v1(11.56,68.83) v1(11.81,76.45) v1(12.29,74.47) v1(12.57,78.36) v1(12.75,71.83) v1(13.23,69.82) v1(13.84,65.79) v1(13.84,64.64) v1(14.22,75.56) v1(14.61,73.66) v1(14.88,71.09) v1(15.24,78.23) v1(15.24,66.29) v1(16.76,66.29) v1(17.65,75.44) v1(17.65,69.09) v1(17.91,65.66) v1(17.91,64.52) v1(18.54,77.47) v1(19.3,63.88) v1(19.68,66.93) v1(20.45,64.64) v1(20.45,62.99) v1(21.08,75.18) v1(21.21,70.23) v1(21.46,65.53) v1(21.46,63.8) v1(21.59,62.1) v1(22.48,64.64) v1(22.48,62.99) v1(22.61,72.9) v1(23.11,70.61) v1(23.11,67.06) v1(23.24,63.75) v1(24.51,63.37) v1(24.51,62.36) v1(24.77,66.17) v1(25.15,64.64) v1(25.4,63.5) v1(26.29,63.37) v1(26.29,62.36) v1(26.67,64.9) v1(26.92,63.88) v1(26.92,62.74) v1(26.92,61.85) v1(27.81,64.39) v1(27.81,63.25)
ADP_FRWEN: length 22.4
  TOP w0.305: R99.2 43.75,37.08 41.97,37.08 C100.2 41.21,36.26 39.88,34.92 TP28.1
  TOP w0.508: R98.1 R99.2
  BOTTOM w0.508: TP28.1 34.16,34.92 JP7.1
ADPS: length 24.1
  TOP w0.203: U1.13 49.08,42.67 48.87,42.88 v1(48.87,42.9)
  TOP w0.508: v1(39.94,39.24) R13.2 ; R13.2 40.06,37.91 C102.1 ; R13.2 C38.2
  BOTTOM w0.508: 39.94,39.29 39.94,41.34 41.5,42.9 v1(48.87,42.9) ; 39.94,39.29 v1(39.94,39.24) ; 39.94,39.29 39.38,38.73 34.92,38.73 TP21.1
BT1: length 13.5
  TOP w0.203: U1.12 49.48,43.23 49.58,43.33
  TOP w0.381: TP15.1 50.98,51.26 50.98,45.89 C30.1
  TOP w0.508: 49.58,43.33 50.32,44.07 51.03,44.07 51.77,44.81 C30.1
BT2: length 20.2
  TOP w0.203: U1.4 52.73,39.41 C36.2
  TOP w0.305: 56.64,40.26 55.63,39.24 54.09,39.24 C36.2
  TOP w0.508: 56.64,40.26 56.64,44.2 57.93,45.48 61.99,45.48 TP22.1
COMPF: length 15
  TOP w0.203: C87.2 49.08,34.79 U1.28
  TOP w0.305: 48.86,31.94 R27.1 ; C87.2 48.13,33.85 48.13,32.39 48.58,31.94
  TOP w0.508: TP37.1 51.44,26.04 47.88,29.59 47.88,31.24 48.58,31.94 48.86,31.94
COMPR: length 15.3
  TOP w0.203: C98.2 49.88,36.67 U1.30
  TOP w0.305: 52.32,32.17 R97.1 51.97,34.61 C98.2
  TOP w0.508: TP34.1 52.32,30.23 52.32,32.17
CSIN: length 20.3
  TOP w0.203: C26.1 48.26,43.32 48.26,42.72 48.68,42.31 U1.14
  TOP w0.508: C26.1 48.77,43.83 R2.2 C29.2 v1(50.16,45.09)
  BOTTOM w0.508: TP11.1 41.81,52.7 43.92,50.6 47.45,50.6 50.93,47.12 50.93,45.85 v1(50.16,45.09)
CSIN1: length 41.5
  TOP w0.152: Q1.7 41.38,62.17 v1(41.38,62.18) ; RS1.1 v1(29.74,62.23)
  TOP w0.203: TP6.1 29.59,69.09 29.59,62.38 v1(29.74,62.23)
  BOTTOM w0.203: v1(29.74,62.23) 29.46,61.95 29.46,54.36 33.07,50.75 41.61,50.75 42.72,49.63 46.25,49.63 48.23,47.65 48.23,47.03 v1(48.77,46.49)
  vias: v1(30.86,63.5) v1(31.72,61.67) v1(31.75,64.26) v1(31.75,62.99) v1(32.73,62.09) v1(32.77,64.01) v1(33.53,62.99) v1(33.66,65.66) v1(34.54,64.01) v1(34.63,62.09) v1(35.56,62.99) v1(35.81,64.39) v1(36.07,66.04) v1(36.54,62.09) v1(36.96,64.77) v1(36.96,63.25) v1(38.1,65.91) v1(38.1,64.14) v1(38.44,62.09) v1(38.99,64.9) v1(38.99,63.25) v1(40.13,64.14) v1(40.35,62.09) v1(40.51,65.91) v1(41.38,63.6) v1(41.35,62.89) v1(42.16,64.64) v1(43.13,63.3) v1(43.13,62.53) v1(43.13,61.82) v1(44.02,63.3) v1(44.02,62.53) v1(44.02,61.82)
CSIP: length 22.3
  TOP w0.203: C26.2 47.31,42.99 48.28,42.02 U1.15
  TOP w0.254: 46.63,45.1 46.63,47.35
  TOP w0.508: 46.63,47.35 43.56,50.42 36.58,50.42 TP12.1 ; C28.2 R1.2 47.37,43.83 C26.2
CSON: length 16.5
  TOP w0.203: U1.1 51.58,38.2 52.83,36.96 53.3,36.96 ; 56.08,36.96 53.3,36.96 ; 56.08,36.96 C37.1 ; 56.08,36.96 56.88,36.96 R14.2 ; 53.3,36.96 C35.2
  TOP w0.508: TP30.1 58.55,34.92 57.62,35.85 R14.2
CSON1: length 141.4
  TOP w0.152: v1(79.88,62.17) 79.89,62.18 RS2.1
  TOP w0.203: v1(79.88,62.17) 79.71,62.35 79.71,67.92 TP29.1
  TOP w0.508: D1.2 v1(41.15,41.35)
  BOTTOM w0.152: v1(81.91,61.95) 81.91,61.75
  BOTTOM w0.203: v1(59.02,36.22) 59.63,36.83 66.04,36.83 79.73,50.52 79.73,62.02 v1(79.88,62.17)
  BOTTOM w0.508: v1(61.61,40.72) 60.67,41.66 57.15,41.66 53.47,37.97 53.47,37.72 ; 84.02,63.7 84.02,74.73 TP8.1 ; v1(41.15,41.35) 41.2,41.4 46.35,41.4 47.24,40.51 47.24,38.35 47.88,37.72 53.47,37.72 ; 53.47,37.72 53.47,34.67 54.23,33.91 61.21,33.91 62.36,32.77 66.42,32.77 80.9,47.24 80.9,61.47 81.53,62.1
  vias: v1(81.94,63.55) v1(81.97,62.66) v1(82.98,63.58) v1(82.99,62.2) v1(84.02,63.55) v1(84.89,62.2) v1(86.11,66.67) v1(86.8,62.2) v1(87,68.2) v1(88.14,63.63) v1(88.39,74.3) v1(88.7,62.2) v1(88.9,66.93) v1(89.28,71.88) v1(89.28,64.77) v1(89.66,69.72) v1(89.92,63.63) v1(90.3,73.28) v1(90.63,62.2) v1(90.8,66.04) v1(91.31,75.69) v1(91.44,72.39) v1(91.57,70.36) v1(92.33,67.31) v1(92.46,74.3) v1(93.47,75.69) v1(93.47,70.48) v1(93.6,71.37) v1(93.6,69.6) v1(93.73,63.5) v1(93.85,72.14) v1(93.85,68.71) v1(93.85,61.98) v1(94.23,72.9) v1(94.36,67.82) v1(94.74,73.66) v1(94.87,67.18) v1(94.87,65.15) v1(95,62.86) v1(95.38,74.3) v1(95.5,66.67) v1(95.63,76.2) v1(95.76,62.1) v1(95.89,63.5) v1(96.01,74.68) v1(96.14,66.29) v1(96.77,75.06) v1(96.77,66.04) v1(97.54,65.79) v1(97.66,75.18) v1(98.42,65.66) v1(98.55,75.31) v1(99.19,65.79) v1(99.31,75.18) v1(99.82,61.98) v1(99.95,66.04) v1(99.95,63.5) v1(100.08,74.93) v1(100.58,66.42) v1(100.71,74.68) v1(100.71,64.64) v1(100.84,62.74) v1(101.22,66.8) v1(101.35,74.17) v1(101.73,62.1) v1(101.85,67.44) v1(101.85,63.5) v1(101.98,73.53) v1(102.36,72.9) v1(102.36,68.07) v1(102.74,72.26) v1(102.74,68.83) v1(103,71.5) v1(103,69.72) v1(103.12,70.61)
CSOP: length 15.5
  TOP w0.203: C37.2 56.11,37.78 56.11,37.34 ; 56.11,37.34 57.21,37.34 R10.2 ; 56.11,37.34 53.92,37.34 53.3,37.96 C34.2 52.43,38 51.82,38.6 U1.2
  TOP w0.305: R10.2 58.36,38.48 59.82,38.48
  TOP w0.508: TP27.1 63.88,38.48 59.82,38.48
CSOP1: length 98.9
  TOP w0.152: v1(65.86,62.23) C110.2
  TOP w0.203: RS2.2 v1(79.17,62.18) 79.3,62.31 79.3,68.71 TP23.1
  BOTTOM w0.203: v1(59.02,37.74) 59.55,37.21 65.86,37.21 79.32,50.67 79.32,62.03 v1(79.17,62.18)
  BOTTOM w0.508: TP58.1 75.72,75.08 75.72,64.77 76.1,64.39 76.1,63.83 ; v1(54.67,34.72) 58.43,38.48 60.83,38.48 62.36,40.01 62.36,41.41 v1(61.61,42.16) 61.61,43.7 63.88,45.97 66.29,45.97 67.94,47.62 67.94,52.45 65.91,54.48 65.91,61.29 66.07,61.44
  vias: v1(63.5,63.4) v1(63.5,62.64) v1(63.5,61.87) v1(63.63,64.8) v1(64.26,63.4) v1(64.26,62.64) v1(64.26,61.87) v1(64.52,65.41) v1(65.15,64.67) v1(65.91,63.63) v1(65.86,62.94) v1(66.04,66.93) v1(66.04,65.41) v1(66.7,62.23) v1(67.06,66.17) v1(67.34,63.25) v1(67.87,64.31) v1(68.07,66.93) v1(68.07,65.41) v1(68.63,62.23) v1(68.88,63.93) v1(69.6,63.22) v1(69.98,66.14) v1(69.98,64.9) v1(70.48,62.23) v1(70.89,63.88) v1(71.88,66.93) v1(71.88,65.28) v1(72.26,64.01) v1(72.34,62.23) v1(72.9,66.04) v1(73.79,65.28) v1(73.91,66.93) v1(73.91,63.63) v1(74.22,62.26) v1(74.68,66.09) v1(74.73,64.36) v1(75.11,63.17) v1(76.05,63.63) v1(76.15,62.26) v1(77.14,61.75) v1(77.17,62.48) v1(77.8,63.22)
DCIN: length 10.6
  TOP w0.203: 46.56,41.4 46.96,41 U1.17
  TOP w0.305: 44.51,43.45 46.56,41.4
  TOP w0.508: v1(44.51,44.96) C31.2 44.51,43.45
  BOTTOM w0.508: v1(44.51,44.96) 41.21,48.26 TP17.1
FRWEN: length 28.5
  TOP w0.203: v1(45.47,39.88) 45.79,40.2 U1.19
  BOTTOM w0.508: JP7.2 24.99,42.39 25.91,43.31 29.08,43.31 30.1,42.29 30.1,40.64 33.78,36.96 40.64,36.96 43.56,39.88 v1(45.47,39.88)
FRWPG: length 30.4
  TOP w0.203: U1.24 47.38,37.09 44.58,34.29 44.58,34.16
  TOP w0.305: 44.58,33.53 44.58,34.16
  TOP w0.508: 44.58,33.53 41.66,30.61 41.66,24.13 38.73,21.21 TP45.1 39.32,20.37 Q8.1 40.51,15.25 40.51,14.19 R36.2
LG1: length 27.4
  TOP w0.203: U1.9 50.68,41.91 51.31,42.54
  TOP w0.305: 51.31,42.54 53.01,44.25 53.64,44.25 54.22,44.82 54.22,45.08 54.23,45.09
  TOP w0.508: 54.23,45.09 54.22,52.46 TP16.1 51.18,55.5 43.18,55.5 42.19,56.49 Q2.4
LG2: length 28.7
  TOP w0.203: U1.7 51.65,40.6 52.07,41.02 52.07,41.53 52.83,42.29
  TOP w0.305: v1(64.9,60.07) 65.02,59.94 Q3.4
  TOP w0.508: TP18.1 64.77,51.43 59.69,46.35 57.66,46.35 55.75,44.45 55.75,42.8 55.24,42.29 52.83,42.29
  BOTTOM w0.508: v1(64.9,60.07) 64.9,52.83 TP18.1
PH1: length 40.5
  TOP w0.203: U1.10 50.27,42.27 51.05,43.05
  TOP w0.305: v1(53.19,45.03) 53.04,45.03 51.05,43.05
  TOP w0.508: TP14.1 45.72,81.91 49.66,77.98 TP56.1 49.66,65.66
  BOTTOM w0.508: v1(53.19,45.03) 53.19,48.03 51.79,49.43 51.79,56.03 50.55,57.28
  vias: v1(43.69,59.31) v1(43.69,58.55) v1(43.69,57.66) v1(44.45,59.31) v1(44.45,58.55) v1(44.45,57.66) v1(45.72,60.2) v1(45.97,61.98) v1(46.1,58.42) v1(46.1,57.4) v1(46.23,62.86) v1(46.23,61.09) v1(46.23,59.44) v1(46.99,64.39) v1(46.99,57.91) v1(47.12,63.25) v1(47.24,61.47) v1(47.24,59.56) v1(47.75,65.28) v1(47.88,62.48) v1(47.88,60.45) v1(48.13,58.55) v1(48.13,57.4) v1(48.39,64.26) v1(48.52,61.34) v1(48.64,63.12) v1(48.64,59.56) v1(49.02,65.28) v1(49.28,58.55) v1(49.66,64.39) v1(49.66,62.74) v1(49.66,60.07) v1(49.73,57.1) v1(50.42,61.34) v1(50.55,65.28) v1(50.67,58.42) v1(50.8,64.01) v1(51.18,62.74) v1(51.18,59.94)
PH2: length 42
  TOP w0.203: U1.6 51.76,40.2 52.98,41.43 v1(53.33,41.43)
  TOP w0.508: 55.38,70.35 TP57.1 ; 55.38,70.35 55.38,78.11 59.18,81.91 TP13.1 ; 55.38,70.35 55.38,66.41 56.09,65.69 ; v1(57.15,65.41) 57.16,65.41
  BOTTOM w0.508: 56.31,57.2 56.31,51.99 55.5,51.18 55.5,42.67 54.25,41.43 v1(53.33,41.43)
  vias: v1(55.75,62.74) v1(55.88,60.2) v1(55.88,58.29) v1(56.26,64.39) v1(56.39,61.34) v1(56.39,57.4) v1(57.15,62.61) v1(57.15,58.29) v1(57.28,60.2) v1(57.66,57.4) v1(58.04,64.52) v1(58.17,61.34) v1(58.29,63.25) v1(58.29,59.44) v1(58.55,58.29) v1(58.93,62.23) v1(59.05,65.41) v1(59.05,60.45) v1(59.31,57.4) v1(59.69,64.52) v1(59.69,63.25) v1(59.69,61.34) v1(59.69,59.56) v1(60.32,58.55) v1(60.45,57.4) v1(60.58,65.41) v1(60.58,60.48) v1(61.01,64.74) v1(61.09,63.65) v1(61.09,62.89) v1(61.09,62.26) v1(61.21,59.46) v1(61.21,58.83) v1(61.21,58.19) v1(61.21,57.56) v1(62.71,59.26) v1(62.74,58.55) v1(62.74,57.76) v1(63.4,59.31) v1(63.37,58.55) v1(63.4,57.76)
PIN_FRWEN: length 58.1
  TOP w0.508: SW1.2 41.96,6.45 41.22,5.71 34.39,5.71 TP43.1
  BOTTOM w0.508: TP43.1 31.29,19.63 20.7,30.23 20.7,36.07 22.45,37.82 JP7.3
PROCHOT: length 39.3
  TOP w0.203: 43.81,33.91 43.81,34.16 46.61,36.96 46.61,38.27 46.94,38.6 U1.23
  TOP w0.508: 43.81,33.91 40.77,30.86 40.77,24.89 39.37,23.49 36.7,23.49 34.29,21.08 TP46.1 35.05,20.19 35.05,17.2 ; 35.05,17.2 30.66,17.2 29.91,16.45 Q9.1 ; 35.05,17.2 R38.2
PROG: length 20
  TOP w0.203: U1.27 48.68,35.91 R23.1
  TOP w0.305: R23.1 46.48,33.72 46.48,26.54 TP33.1
PULLUP: length 56.8
  TOP w0.508: R16.2 R15.2 25.15,33.15 JP6.2 ; v1(54.76,11.46) R39.1 54.78,11.48 R31.1 R34.2 ; R33.2 R28.1 42,11.38 R36.1 ; v1(36.7,11.62) R38.1
  BOTTOM w0.508: v1(54.76,11.46) 54.74,11.43 v1(43.43,11.43) 36.89,11.43 v1(36.7,11.62) 35.94,12.38 35.94,16.64 24.38,28.19 24.38,30.23 25.02,30.86 JP6.2
REF: length 19.7
  TOP w0.203: U1.29 49.48,36.25 50.42,35.31 C45.2 v1(50.42,34.54)
  BOTTOM w0.508: v1(50.42,34.54) 51.18,33.78 51.18,32.64 54.1,29.72 54.1,23.37 TP36.1
RVSEN: length 52.6
  TOP w0.203: U1.20 46.28,39.8 45.34,38.86 45.34,37.47 43.43,35.56
  TOP w0.305: TP44.1 37.21,30.48 42.29,35.56 43.43,35.56
  TOP w0.508: SW2.2 54.79,9.73 53.52,11 v1(53.52,12.45)
  BOTTOM w0.508: TP44.1 37.97,30.48 41.27,27.18 41.27,21.08 49.4,12.95 53.01,12.95 v1(53.52,12.45)
RVSPG: length 30.9
  TOP w0.203: 45.85,34.16 45.85,34.29 47.24,35.69 47.75,35.69 48.28,36.21 U1.26
  TOP w0.508: 45.85,34.16 45.85,22.73 TP47.1 49.91,18.67 Q10.1 51.05,15.23 51.05,14.73 51.69,14.1 53.53,14.1 R39.2
SCL: length 50.8
  TOP w0.203: U1.22 46.75,39.01 46.23,38.48 46.23,37.21 43.56,34.54
  TOP w0.305: v1(21.59,11.49) 21.21,11.87 21.21,18.75 26.29,23.83 26.29,29.02 v1(26.67,29.4) ; TP26.1 38.73,29.97 43.31,34.54 43.56,34.54
  BOTTOM w0.305: v1(26.67,29.4) 28.13,27.94 36.83,27.94 TP26.1
SDA: length 50.7
  TOP w0.203: 42.8,35.05 43.56,35.05 45.85,37.34 45.85,38.73 46.52,39.41 U1.21
  TOP w0.305: 42.8,35.05 34.29,26.54 TP24.1 ; v1(25.15,29.4) 25.63,28.92 25.63,23.98 20.57,18.92 20.57,12 v1(20.07,11.49)
  BOTTOM w0.305: v1(25.15,29.4) 27.37,27.18 33.15,27.18 TP24.1
UG1: length 29.4
  TOP w0.203: U1.11 49.88,42.64 v1(50.32,43.08)
  TOP w0.305: v1(45.24,64.06) Q1.4
  BOTTOM w0.508: v1(45.24,64.06) 45.24,61.98 43,59.74 43,54.79 TP9.1 46.74,52.7 51.69,47.75 51.69,44.45 v1(50.32,43.08)
UG2: length 31.9
  TOP w0.203: v1(52.4,40.01) 52.2,39.8 U1.5
  TOP w0.305: v1(62,60.91) 62,61.5 Q4.4
  BOTTOM w0.508: v1(52.4,40.01) 54.23,40.01 56.39,42.16 56.39,50.67 TP10.1 60.96,52.7 64.14,55.88 64.14,60.02 63.25,60.91 v1(62,60.91)
VOUT: length 18.6
  TOP w0.203: U1.31 50.28,36.85 51.05,36.07 51.93,36.07 R12.2
  TOP w0.305: 55.88,35.43 53.99,35.43 R12.2
  TOP w0.508: TP35.1 60.83,30.48 55.88,35.43
VSYS1: length 19.2
  TOP w0.203: 52.7,38.73 52.43,39.01 U1.3
  TOP w0.305: 56.26,38.73 52.7,38.73
  TOP w0.508: 56.26,38.73 56.79,39.27 R94.1 57.62,40.67 C103.2 R93.2 C104.2 57.59,43.88 58.29,44.58 64.01,44.58 TP25.1
N3388611: length 7
  BOTTOM w0.508: R87.2 12.57,19.24 12.57,21.84 13.46,22.73 C85.2 R88.1
N3403853: length 2.1
  BOTTOM w0.305: R86.2 21.32,13.16 U2.29
N3403912: length 2.2
  BOTTOM w0.305: U2.30 20.52,13.34 R85.2
N3404418: length 17.9
  TOP w0.508: v1(16.18,21.21) 15.6,21.79 J10.1
  BOTTOM w0.305: 17.39,21.21 U2.7
  BOTTOM w0.508: R84.2 10.67,23.32 J10.1 ; U2.7 U2.8 ; 17.39,21.21 v1(16.18,21.21) 15.07,21.21 C86.2
N3404574: length 10.3
  TOP w0.254: J10.2 14.84,20.99
  TOP w0.305: 14.84,20.99 v1(16.26,19.58)
  BOTTOM w0.305: U2.5 v1(16.26,19.58)
N3404616: length 10.8
  BOTTOM w0.305: J10.3 9.91,20.19 12.83,17.27 15.7,17.27 16,17.58 16,18.29 16.49,18.78 U2.4
N3405190: length 4.2
  BOTTOM w0.305: R87.1 C84.2 15.74,20.38 U2.6
N3405391: length 4.1
  BOTTOM w0.508: R88.2 17.27,24.13 17.93,23.48 U2.9
N3864784: length 1.5
  BOTTOM w0.305: R81.2 12.25,28.07 U3.7
N3864951: length 1.7
  BOTTOM w0.305: U3.6 13.65,27.56 C82.2
N3865052: length 4.1
  BOTTOM w0.305: U3.3 16.76,28.58 17.34,28 R82.1 18.03,25.97 R83.2
N3866091: length 5.4
  BOTTOM w0.305: 13.64,29.34 U3.9 ; 13.64,29.34 U3.10 ; 13.64,29.34 13.45,29.53
  BOTTOM w0.508: R81.1 13.45,29.53 ; R81.1 R84.1 ; R81.1 12.19,30.1 11.87,30.42 C81.2
N3880625: length 1.5
  TOP w0.508: R27.2 C46.2
N3892442: length 6.2
  TOP w0.203: 45.21,44.45 45.21,45.66 R4.2 ; U1.16 47.88,41.79 47.63,42.04
  TOP w0.305: 45.21,44.45 47.63,42.04
N3896496: length 4.1
  TOP w0.508: R7.2 41.91,44.96 40.69,43.74 D1.3
N3899462: length 2.5
  TOP w0.508: R34.1 57.52,13.83 57.77,14.08 LED3.2
N3906567: length 3.2
  TOP w0.508: SW1.1 39.42,11.26 R44.1
N3906607: length 3.3
  TOP w0.508: SW1.3 44.5,10.21 44.84,10.55 R28.2
N3907387: length 3
  TOP w0.508: R45.1 52.25,11.32 SW2.1
N3907453: length 3.2
  TOP w0.508: SW2.3 57.33,10.46 57.52,10.66 R31.2
N3914358: length 3.7
  TOP w0.508: R33.1 45.03,12.9 47.18,15.05 LED2.2
N3914362: length 2.3
  TOP w0.508: LED2.1 Q8.3
N3952115: length 1.4
  TOP w0.305: R11.2 C36.1
N4021953: length 1.4
  TOP w0.508: C30.2 R6.2
N4039122: length 2.3
  TOP w0.508: LED3.1 Q10.3
N4143346: length 4.1
  TOP w0.508: R103.2 R102.1 R93.1 C104.1
N4149486: length 1.4
  TOP w0.508: R97.2 C99.2
N4161658: length 2.5
  TOP w0.508: R32.1 36.7,15.43 LED1.2
N4161662: length 2
  TOP w0.508: LED1.1 Q9.3

## Copper pours and planes (outline as drawn; the poured copper is in the pictures)
GND on TOP: 4.83,44.07 0.64,48.26 0.64,55.63 3.43,58.42 17.14,58.42 19.68,60.96 41.91,60.96 42.67,60.2 42.67,57.91 41.53,57.91 41.27,57.66 41.27,56.18 40.21,55.12 33.91,55.12 22.86,44.07
GND on TOP: 5.21,24.69 2.36,24.69 2.34,24.66 2.34,23.27 3.25,23.27 3.25,17.04 2.34,17.04 2.34,15.62 2.36,15.6 5.21,15.6 5.23,15.62 5.23,24.66
GND on TOP: 89.09,42.1 78.17,53.02 66.99,53.02 64.62,55.4 64.62,58.93 65.79,58.93 66.29,59.44 66.29,60.96 102.51,60.96 103.67,59.8 103.67,44.08 101.69,42.1
GND on BOTTOM: 12.95,31.62 12.95,30.86 13.46,30.86 14.22,30.1 14.22,27.58 14.27,27.58 14.72,27.14 14.72,25.54 14.71,25.53 16.97,25.53 16.97,26.31 16.64,26.64 16.64,28.22 15.72,28.22 15.72,29.46 15.11,29.46 15.11,31.62
GND on BOTTOM: 65.47,71.06 65.91,70.61 74.42,70.61 74.93,71.12 74.93,73.41 74.3,74.04 65.91,74.04 65.47,73.6
GND on BOTTOM: 30.86,60.93 41.88,60.93 42.65,60.17 42.65,56.49 41.27,55.12 30.84,55.12 30.35,55.6 30.35,60.43
GND on BOTTOM: 101.65,42.09 103.63,44.07 103.63,59.82 102.49,60.96 82.17,60.96 81.56,60.35 81.56,49.63 89.1,42.09
GND on BOTTOM: 0.64,55.63 0.64,48.13 4.7,44.07 22.61,44.07 27.56,49.02 27.56,60.2 26.8,60.96 19.68,60.96 17.14,58.42 3.43,58.42
GND on BOTTOM: 2.64,15.75 5.51,15.75 5.51,24.79 2.64,24.79 2.59,24.74 2.59,15.8
GND on BOTTOM: 47.9,40.67 47.9,38.48 48.03,38.35 50.47,38.35 50.62,38.51 50.62,40.56 50.29,40.89 48.13,40.89
GND on BOTTOM: 66.55,54.86 68.2,53.21 76.2,53.21 77.22,54.23 77.22,60.32 76.58,60.96 66.88,60.96 66.55,60.63
GND on L2: 8,0.99 8,8.64 0.64,8.64 0.64,80.64 7.11,80.64 7.11,86.36 97.16,86.36 97.16,80.04 103.89,80.04 103.89,8.89 97.28,8.89 97.28,0.99
GND on L3: 8,1.27 8,8.25 0.64,8.25 0.64,80.64 7.11,80.64 7.11,86.36 97.13,86.36 97.13,80.01 104.01,80.01 104.01,8.89 97.38,8.89 97.38,1.27
ADP on TOP: 3.77,64.05 0.64,67.18 0.64,76.03 4.06,79.46 19.63,79.46 24.77,74.33 24.77,68.45 28.45,64.77 28.45,61.59 19.68,61.59 17.23,64.05
ADP on BOTTOM: 3.81,64.01 0.64,67.18 0.64,76.07 4,79.44 19.61,79.44 24.74,74.31 24.74,68.43 28.32,64.85 28.32,62.08 27.84,61.59 19.68,61.59 17.27,64.01
CSIN1 on TOP (solid shape): 44.3,60.74 43.79,60.74 43.79,61.33 42.01,61.33 42.01,61.71 42.52,61.71 42.52,61.99 42.01,61.99 42.01,62.34 42.52,62.34 42.52,62.65 42.01,62.65 42.01,63 42.52,63 42.52,63.28 42.01,63.28 42.01,63.66 43.79,63.66 43.79,64.25 44.3,64.25
CSIN1 on TOP: 41.63,61.21 42.16,60.68 44.4,60.68 44.4,64.26 41.99,66.67 32.51,66.67 30.1,64.26 30.1,61.21
CSIN1 on BOTTOM: 44.37,61.72 44.37,64.24 41.96,66.65 32.49,66.65 30.35,64.52 30.35,61.7 30.84,61.21 43.87,61.21
CSON1 on TOP: 80.39,61.43 80.39,64.9 85.09,69.6 85.09,72.39 89.41,76.71 100.46,76.71 103.83,73.33 103.83,62.19 103.07,61.43
CSON1 on BOTTOM: 81.43,64.47 84.3,64.47 85.06,65.23 85.06,72.34 89.43,76.71 100.38,76.71 103.82,73.27 103.82,62.2 103.06,61.44 81.36,61.44 80.77,62.03 80.77,63.8
CSOP1 on TOP (solid shape): 63.42,63.67 65.2,63.67 65.2,63.28 64.69,63.28 64.69,63 65.2,63 65.2,62.65 64.69,62.65 64.69,62.34 65.2,62.34 65.2,61.99 64.69,61.99 64.69,61.71 65.2,61.71 65.2,61.33 63.42,61.33 63.42,60.74 62.92,60.74 62.92,64.25 63.42,64.25
CSOP1 on TOP: 62.94,61.34 62.94,65.99 64.39,67.44 76.23,67.44 78.74,64.92 78.74,61.34
CSOP1 on BOTTOM: 63.63,61.34 63.12,61.85 63.12,66.17 64.39,67.44 74.42,67.44 75.13,66.73 75.13,64.67 75.77,64.03 77.42,64.03 78.03,63.42 78.03,61.87 77.5,61.34
PH1 on TOP (solid shape): 43.64,59.58 45.42,59.58 45.42,59.19 44.91,59.19 44.91,58.92 45.42,58.92 45.42,58.56 44.91,58.56 44.91,58.25 45.42,58.25 45.42,57.9 44.91,57.9 44.91,57.62 45.42,57.62 45.42,57.24 43.64,57.24 43.64,56.65 43.13,56.65 43.13,60.16 43.64,60.16
PH1 on TOP: 43.1,56.62 43.1,60.22 44.73,60.22 44.73,63.09 45.92,63.09 46.23,63.4 46.23,65.15 46.89,65.81 50.95,65.81 51.51,65.25 51.51,57.1 51.03,56.62
PH1 on BOTTOM: 43.31,59.44 45.72,61.85 45.72,64.64 46.86,65.79 50.93,65.79 51.49,65.23 51.49,57.12 50.95,56.59 44.25,56.59 43.31,57.53
PH2 on TOP (solid shape): 64.08,56.71 63.58,56.71 63.58,57.29 61.8,57.29 61.8,57.67 62.31,57.67 62.31,57.95 61.8,57.95 61.8,58.31 62.31,58.31 62.31,58.61 61.8,58.61 61.8,58.97 62.31,58.97 62.31,59.25 61.8,59.25 61.8,59.63 63.58,59.63 63.58,60.21 64.08,60.21
PH2 on TOP: 55.88,56.64 55.3,57.23 55.3,65.2 56.13,66.04 61.29,66.04 62.46,64.87 62.46,61.98 61.32,61.98 61.32,60.71 61.57,60.45 64.11,60.45 64.11,56.64
PH2 on BOTTOM: 55.78,56.74 55.27,57.25 55.27,65.18 56.13,66.04 60.68,66.04 61.32,65.41 61.32,60.73 61.59,60.45 62.86,60.45 63.75,59.56 63.75,57.28 63.22,56.74
N3865034 on BOTTOM: 16.03,28.96 16.03,30.12 15.49,30.66 15.49,34.16 17.14,34.16 17.14,32.13 18.41,30.86 18.41,28.96

## Text on the board
BOTTOM: SolderSide - Bottom
TOP: Component Side - TOP
Ref Des/Silkscreen Top: 3V3 | GND | ADP | PIN_FRWEN | CSIN1 | ADP_FRWEN | PROCHOT | RVSEN | CSIP | ADPS | VDD | SDA | PH1 | HI | FRWPG | SCL | CSIN | DCIN | ADDR0 | UG1 | LO | RVSPG | BT1 | COMPF | PROG | LG1 | PH2 | COMPR | REF | VDDP | UG2 | VSYS1 | CSOP | CSON | VOUT | LG2 | BT2 | CSOP1 | ADDR1 | CSON1 | VSYS | LDO | PULLUP | FRWEN | ISL95338EVAL1Z REV B
L2: Internal Plane - L2
L3: Interbal etch - L3
DIMENSION: .028 | .076 | 3.  SMOBC SOLDERMASK BOTH SIDES USING RED RESIST. IAW IPC-SM-840 | 4.  SILKSCREEN BOTH SIDE(S) USING WHITE NON CONDUCTIVE EPOXY BASED | 1.  THIS IS A 4 LAYER BOARD WITH COMPONENTS ON BOTH SIDES. | 2.  PRINTED CIRCUIT BOARD SHALL BE 2 OUNCE COPPER. | INK. TRIM ALL SILKSCREEN 4mils FROM BARE COPPER | BOARD METERIAL TO BE EXPOXY BASED FR-4. | NOTES:
BODY_CENTER: SLOTS TO BE PLATED | DETAIL  A
DISPLAY_TOP: 13.6 Preprege | 13.6 Prepreg | 31 mil CORE | +/-10% | .062 | ADJUST CENTER CORE TO ACHIVE BOARD THICKNESS | 4 LAYER STACKING | LAYER 3 | LAYER 2 | LAYER 4 | LAYER 1 | SCALE: NONE | Top Etch 2 oz. Finished | PWR Plane 2 oz. | GND Plane 2 oz. | Bottom Etch 2 oz. Finished
DISPLAY_BOTTOM: MARGARET SAVIEO | 06-17-16 | ISL95338EVAL1ZA | Xunwei Yu | ISL95338EVAL1Z
PAGE_OUTLINE: NAME | ISL95338EVAL1Z | LAYER | DATE | REV. | 06/17/16 | A
User.9: Internal Etch - L4
User.10: PasteMask Top
User.11: PasteMask Bottom
User.12: SolderMask Top
User.13: SolderMask Bottom
User.14: Silkscreen Top
User.15: Silkscreen Bottom
User.16: NOTE: All VIAS to be TENTED. NO exposed copper pads on any | VIAS top or bottom Except VIAS in SMT pads. | 6 . ELECTROLESS NICKEL GOLD OR IMMERSION GOLD BOARD FINISH. | 7 . MINIMUM TRACE WIDTH 8 MILS/ SPACE 6 MILS | 5 . MANUFACTURE/FABRICATE TO MEET EU RoHS DIRECTIVE. | Tg > 170 C | ALL MATERIALS AND SOLDERMASK TO BE COMPLIANT TO EU RoHS | Td > 294 C | DIRECTIVE 20002/95/EC | LAMINATE AND RESIN MATERIAL PARAMETERS
User.18: Internal Etch - L5
User.20: Internal Etch - L6
User.21: Internal Plane - L7
User.22: Fabrication Drawing | N/A | 1 of 1 | A
User.23: Assembly Drawing | 1 of 1 | A
User.25: TOP ASSEMBLY
User.26: BOTTOM ASSEMBLY
User.29: FIGURE | SIZE | 10.0 | 28.0 | 37.0 | 41.0 | 43.0 | 93.0 | 155.0 | 128.0 | 76.0x28.0 | DRILL CHART: TOP to BOTTOM | ALL UNITS ARE IN MILS | PLATED | NON-PLATED | QTY | 666 | 5 | 6 | 8 | 51 | 2 | 4
User.32: U2 | R88 | C86 | R87 | C82 | C83 | U3 | R84 | R34 | C22 | R86 | R85 | C84 | R83 | R82 | C85 | R81 | C81
User.33: BOTTOM ASSEMBLY
